# Altium PCB nguon5vPCB.PcbDoc
Units mil, origin at the board's own origin, x right, y up, seen from the top; angles counter-clockwise.
Board outline 6000 x 4000 mil, 2 copper layers (Top Layer, Bottom Layer); 5 components, 3 nets, 11 pads, 0 vias.
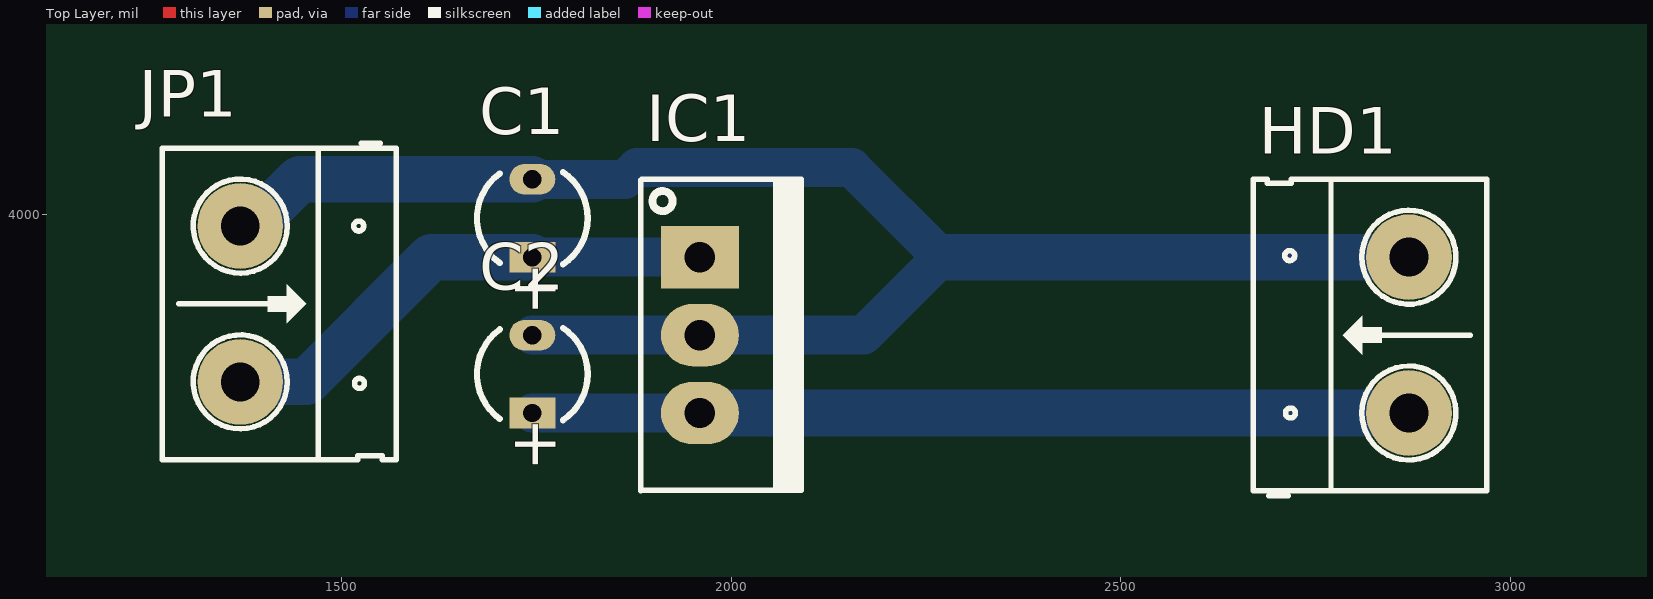
[diagram p0: Top Layer view]
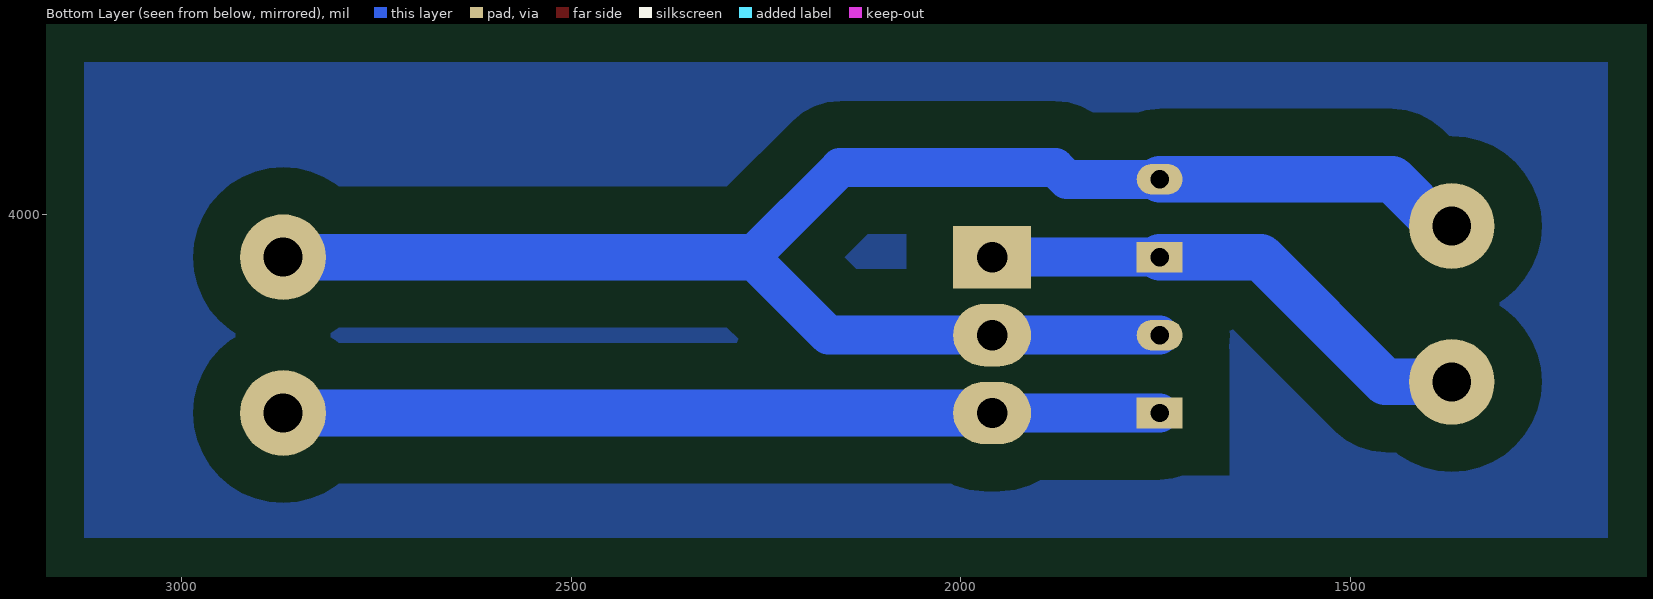
[diagram p1: Bottom Layer view, seen from below]
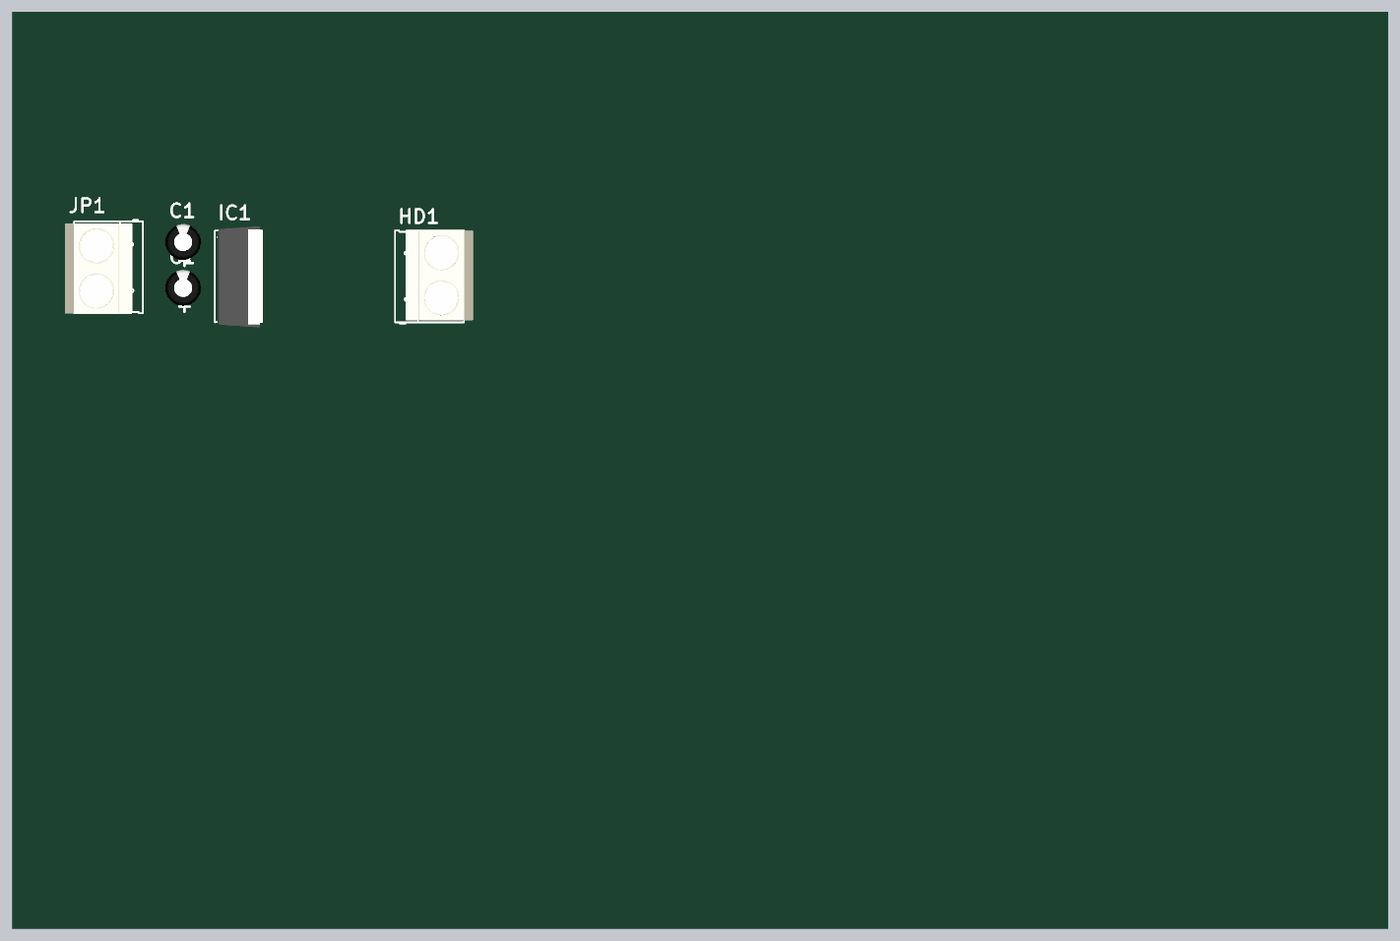
[diagram p2: 3D render of the assembled board from above, using the file's embedded part models]

## Layer stack, top to bottom
Top Solder: solder mask 0.4, Solder Resist, Dk 3.5
Top Layer: signal copper 1.4
Dielectric 1: dielectric 12.6, FR-4, Dk 4.8
Bottom Layer: signal copper 1.4
Bottom Solder: solder mask 0.4, Solder Resist, Dk 3.5

## Board outline
1000,1000 7000,1000 7000,5000 1000,5000

## Design rules (kind name [scope] priority, off if disabled: settings)
Clearance [All] p1: gap=60 ignorepadtopadclearanceinfootprint=FALSE
PolygonConnect [All] p1: connectstyle=Relief reliefconductorwidth=10 reliefentries=4 polygonreliefangle="90 Angle" airgapwidth=10
RoutingLayers [All] p1: top layer_v5=FALSE bottom layer_v5=TRUE
RoutingVias [All] p1: holewidth=28 width=50 viastyle="Through Hole" minholewidth=28 minwidth=50 maxholewidth=28 maxwidth=50
SolderMaskExpansion [All] p1: expansion=4
UnRoutedNet [All] p1: checkbadconnections=TRUE
Width [All] p1: maxlimit=60 minlimit=50 preferedwidth=50
28 further rules are at their usual default settings.

## Components (designator, comment, footprint, x,y, rotation, side; value= is the part's Value field where it differs from the comment)
C1 "Cap Pol 3mm" C3MM 1744.84,3995 r90 top
C2 "Cap Pol 3mm" C3MM 1744.84,3795 r90 top
HD1 "Header 2" HED2 2870,3745 r90 top
IC1 "LM7805" QTO-220 1960,3945 r270 top
JP1 "Header 2_1" HED2 1370,3985 r270 top value="Header 2"

## Footprints (in the part's own frame and the unit in brackets; to place one, negate y for a bottom-side part, rotate by r counter-clockwise, add the part's x,y. Pads: shape width x height; smd on the part's side, far side on the other; paste and mask are expansions set on the pad)
C3MM [mm]
  rect 1x1.5 hole 0.6: 1(-1.27,0)
  oval 1x1.5 hole 0.6: 2(1.27,0)
  silkscreen extent -1.5,-1.81 1.5,1.8, body extent -2,-2.03 1.99,1.97, height 7.01
HED2 [mil] "Header 2, 2 pin, hight 300mil, Pin to Pin 200, Colour Green"
  round 110 hole 50: 1(0,0) 2(200,0)
  silkscreen extent -106,-100 300,200, body extent -92,-140 302,155, height 394
QTO-220 [mil] "TO-220 - 1-2-3"
  rect 80x100 hole 39: 1(0,0)
  oval 80x100 hole 39: 2(100,0) 3(200,0)
  silkscreen extent -100,-76 300,130, body extent -119,-64 322,121, height 755

## Part data
C1 C2: "Polarized Capacitor (Axial)", =1uF, LatestRevisionDate=17-Jul-2002, LatestRevisionNote="Re-released for DXP Platform.", PackageReference=POLAR0.8, Published=8-Jun-2000, Publisher="Altium Limited"
HD1: library part Hed2, "Header 2 (Green)"
IC1: library part LM78xx, "On ap +, from + 5 to + 24VDC", =LM7808
JP1: "Header, 2-Pin", Manufacturer="Generic Components", Class=Connector

## Nets (pads, with @x,y where several pads share a name; then routed paths per layer and width w, separated by ;. In a path a pad name is that pad's centre, name@x,y a point inside that pad or via, vN(x,y) a via of type N, cw(c..) or ccw(c..) an arc to the next point about the centre after c; other vN are vias at no path point)
GND: C1.2 C2.2 HD1.2 IC1.2 JP1.1 | length 2145.3
  Bottom Layer w50: JP1.1 JP1.1@1386.24,3985 ; C2.2 IC1.2 2170,3845 2270,3945 2155,4060 1878.93,4060 1863.93,4045 C1.2
  Bottom Layer w60: JP1.1@1386.24,3985 1446.24,4045 C1.2 ; 2270,3945 HD1.2
NetC2_1: C2.1 HD1.1 IC1.3 | length 1125.2
  Bottom Layer w50: C2.1 IC1.3
  Bottom Layer w60: IC1.3 HD1.1
VCC: C1.1 IC1.1 JP1.2 | length 656.3
  Bottom Layer w50: C1.1 IC1.1
  Bottom Layer w60: JP1.2 1455,3785 1615,3945 C1.1

## Polygon pours and split planes (outlines as drawn)
no net on Bottom Layer (solid, pour order 2): 1290,4310
no net on Bottom Layer (solid, pour order 0): 3125,4195 3125,3585 1170,3585 1170,4195

## Text inside footprints (layer, text, board x,y; h text height)
C1: Top Overlay "+" at 1774.84,3870 h60 r90
C2: Top Overlay "+" at 1774.84,3670 h60 r90